# Altium PCB PCB1.PcbDoc
Units mm, origin at the board's own origin, x right, y up, seen from the top; angles counter-clockwise.
Board outline 114.17 x 52.7 mm, 2 copper layers (Top Layer, Bottom Layer); 27 components, 26 nets, 108 pads, 2 vias.
Unrouted connection lines stored in the file: 1.
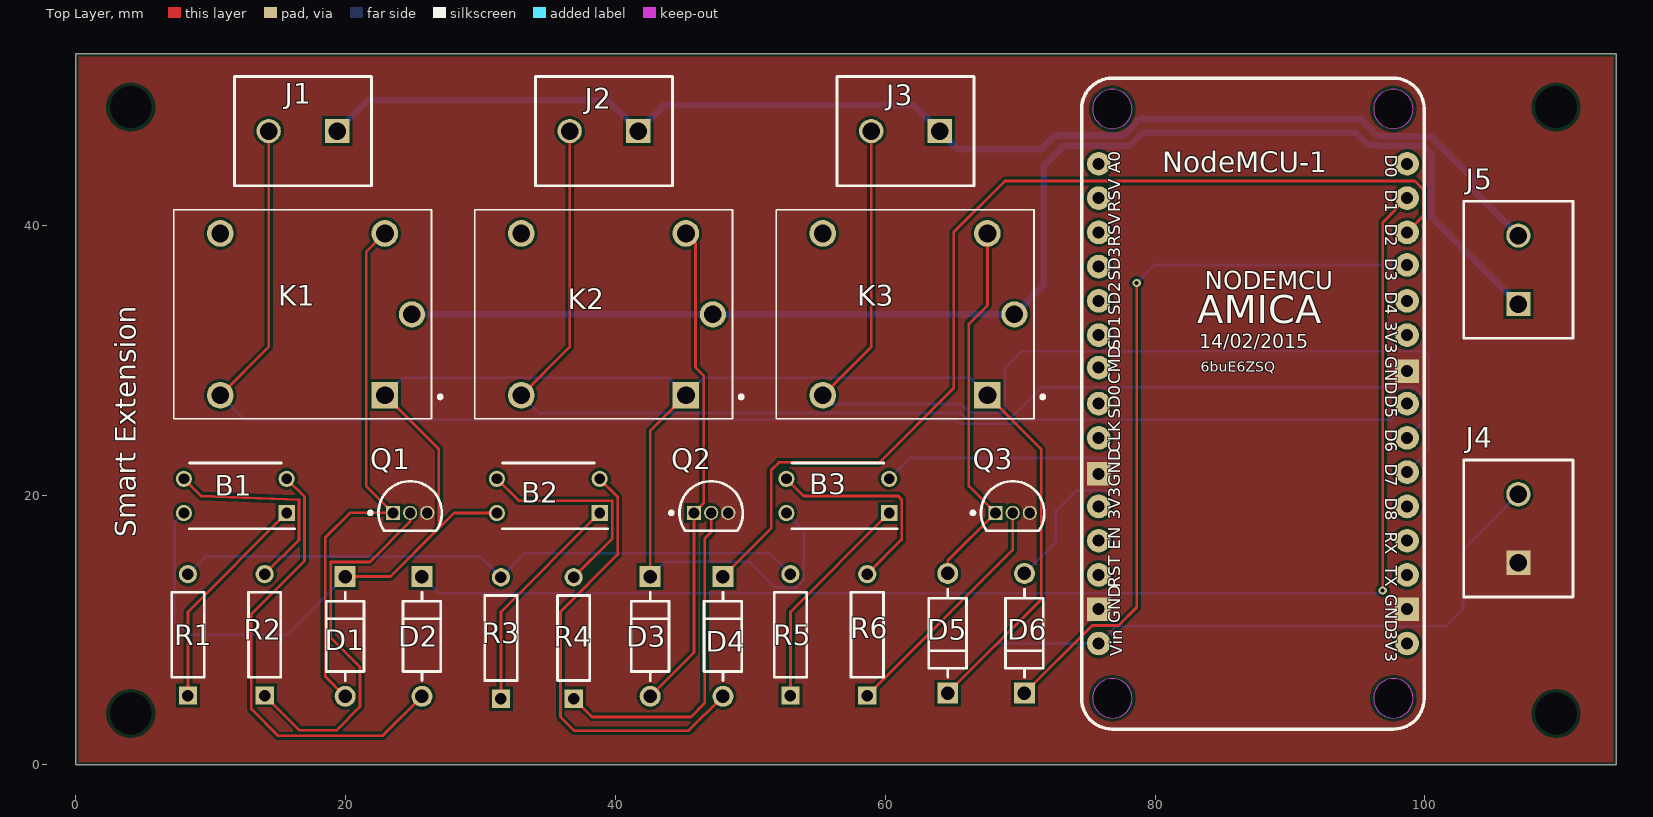
[diagram p0: Top Layer view]
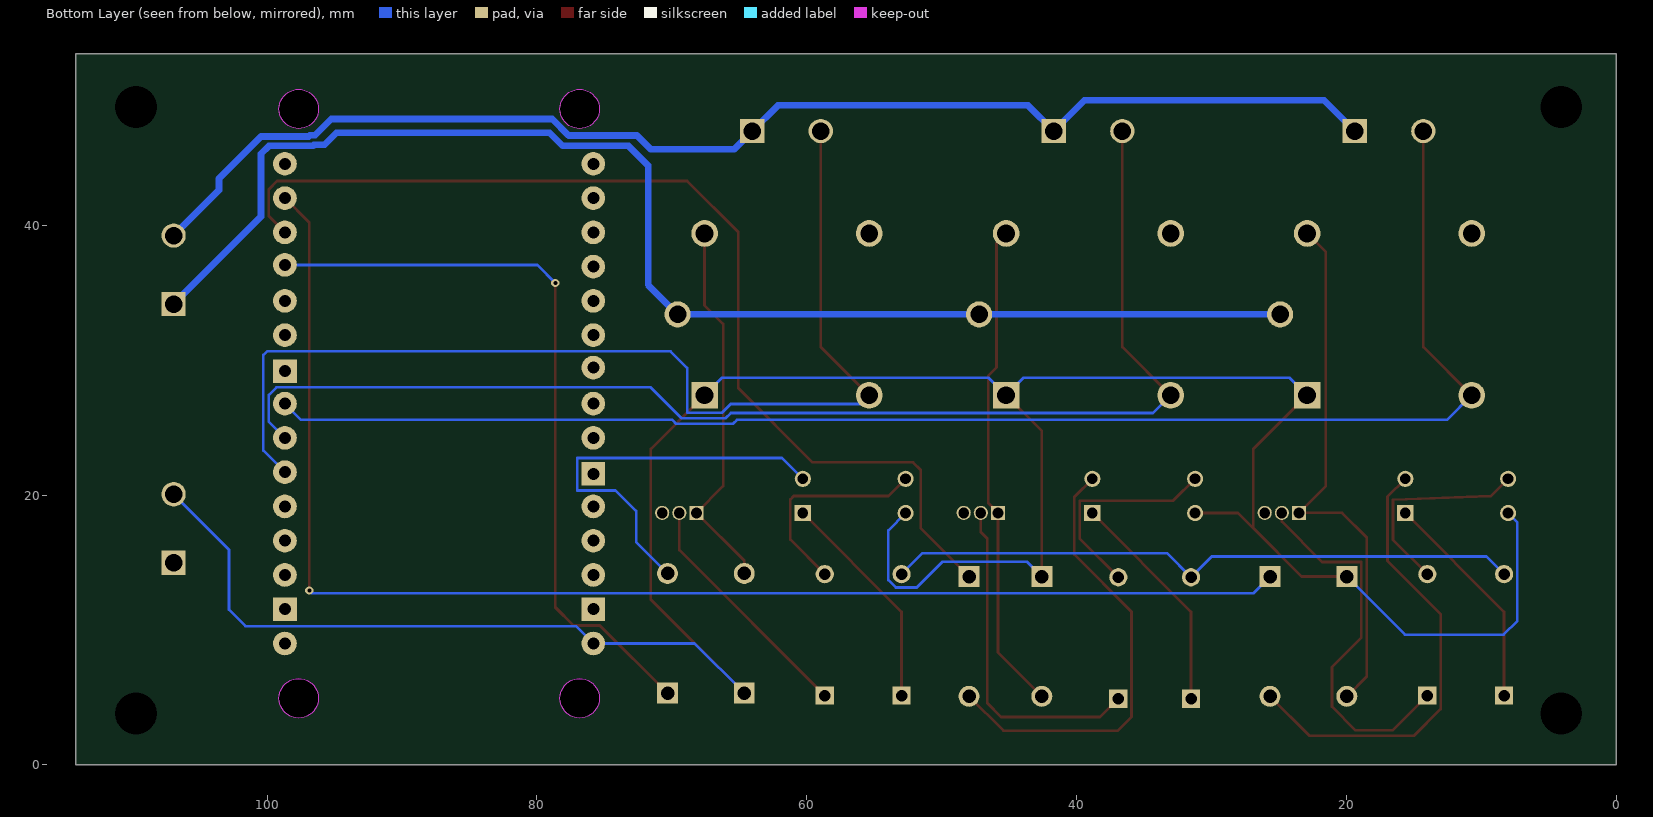
[diagram p1: Bottom Layer view, seen from below]
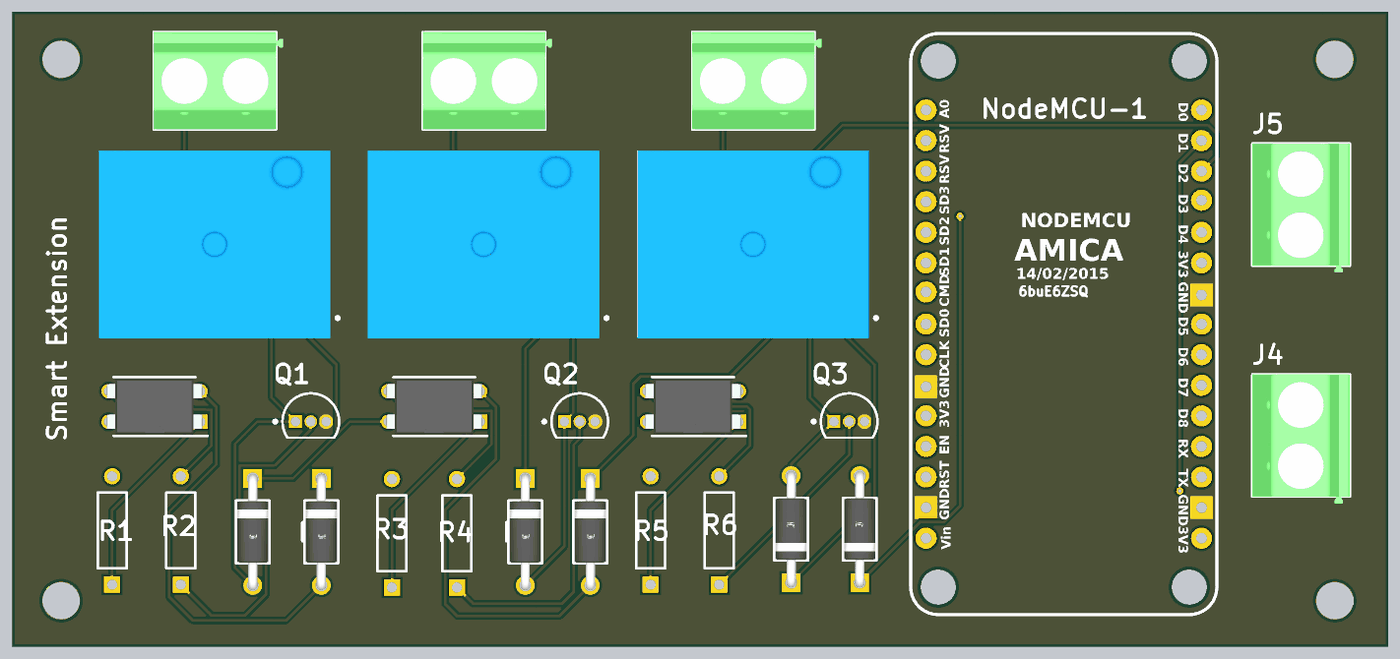
[diagram p2: 3D render of the assembled board from above, using the file's embedded part models]

## Layer stack, top to bottom
Top Solder: solder mask 0.0102, Solder Resist, Dk 3.5
Top Layer: signal copper 0.0356
Dielectric 1: dielectric 0.32, FR-4, Dk 4.8
Bottom Layer: signal copper 0.0356
Bottom Solder: solder mask 0.0102, Solder Resist, Dk 3.5

## Board outline
0,0 114.173,0 114.173,52.705 0,52.705

## Design rules (kind name [scope] priority, off if disabled: settings)
BoardOutlineClearance [All] p1: gap=0.2 ignorepadtopadclearanceinfootprint=FALSE
Clearance [All] p1: gap=0.203 ignorepadtopadclearanceinfootprint=FALSE except(0.25: Arc-Hole Track-Hole SMDPad-Hole THPad-Hole Via-Hole Fill-Hole Poly-Hole Region-Hole Text-Hole)
ComponentClearance [All] p1: gap=0.127 collisioncheckmode=3 verticalgap=0.127 showdistances=TRUE
DiffPairsRouting [All] p1: maxlimit=0.381 minlimit=0.203 mostfreqgap=0.203 toplayer_minwidth=0.203 toplayer_maxwidth=25.4 toplayer_prefwidth=0.203 bottomlayer_minwidth=0.203 bottomlayer_maxwidth=25.4 bottomlayer_prefwidth=0.203 maxuncoupledlength=12.7
Height [All] p1: minheight=0 maxheight=1816.048 prefheight=12.7
HoleSize [All] p1: absolutevalues=TRUE maxlimit=6.3 minlimit=0.3 maxpercent=80.000 minpercent=20.000
HoleToHoleClearance [All] p1: gap=0.25 allowstackedmicrovias=FALSE
MinimumAnnularRing [All] p1: minimumring=0.076
MinimumSolderMaskSliver [All] p1: minsoldermaskwidth=0
PlaneClearance [All] p1: clearance=0.203
PlaneConnect PlaneConnectPowerPads [InPadClass('PowerPads')] p1: planeconnectstyle=Direct reliefexpansion=0.508 reliefentries=4 reliefconductorwidth=0.254 reliefairgap=0.254
PlaneConnect [All] p2: pad.planeconnectstyle=Relief pad.reliefexpansion=0.3 pad.reliefentries=4 pad.reliefconductorwidth=0.203 pad.reliefairgap=0.203 via.planeconnectstyle=Direct via.reliefexpansion=0.3 via.reliefentries=4 via.reliefconductorwidth=0.127 via.reliefairgap=0.127
PolygonConnect PolygonConnectPowerPads [All vs (InPadClass('PowerPads'))] p1: connectstyle=Direct reliefconductorwidth=0.254 reliefentries=4 polygonreliefangle="90 Angle" airgapwidth=0.254
PolygonConnect [All] p2: connectstyle=Direct reliefconductorwidth=0.203 reliefentries=4 polygonreliefangle="90 Angle" airgapwidth=0.203
RoutingVias [All] p1: holewidth=0.3 width=0.6 viastyle="Through Hole" minholewidth=0.3 minwidth=0.6 maxholewidth=0.6 maxwidth=6.6
SilkToSilkClearance [All] p1: silktosilkclearance=0
SilkToSolderMaskClearance [IsPad] p1: minsilkscreentomaskgap=0.127 clearancetoexposedcopper=TRUE
SolderMaskExpansion [All] p1: expansion=0.075 istentingtop=FALSE
Width [All] p1: maxlimit=25.4 minlimit=0.203 preferedwidth=0.203 minimp=50.000000 maximp=50.000000 favimp=50.000000
20 further rules are at their usual default settings.

## Classes and differential pairs
component class 3_channel_relay: B1 B2 B3 D1 D2 D3 D4 D5 D6 J3 K1 K2 K3 NodeMCU1 Q1 Q2 Q3 R1 R2 R3 R4 R5 R6

## Components (designator, comment, footprint, x,y, rotation, side; value= is the part's Value field where it differs from the comment)
B1 "PC817X2NSZ0F" DIP762W60P254L458H400Q4N 11.811,19.939 r180 top
B2 "PC817X2NSZ0F" DIP762W60P254L458H400Q4N 35.015,19.939 r180 top
B3 "PC817X2NSZ0F" DIP762W60P254L458H400Q4N 56.478,19.939 r180 top
D1 "1N4007" FP-1N4007-MFG 19.959,9.525 r270 top value=15pF
D2 "1N4007" FP-1N4007-MFG 25.651,9.525 r270 top value=15pF
D3 "1N4007" FP-1N4007-MFG 42.571,9.525 r270 top value=15pF
D4 "1N4007" FP-1N4007-MFG 47.966,9.525 r270 top value=15pF
D5 "1N4007" FP-1N4007-MFG 64.626,9.755 r90 top value=15pF
D6 "1N4007" FP-1N4007-MFG 70.318,9.755 r90 top value=15pF
J1 "1729128" PHOE-1729128-2_V 16.829,46.99 r180 top
J2 "1729128" PHOE-1729128-2_V 39.144,46.99 r180 top
J3 "1729128" PHOE-1729128-2_V 61.496,46.99 r180 top
J4 "1729128" PHOE-1729128-2_V 106.934,17.526 r90 top
J5 "1729128" PHOE-1729128-2_V 106.934,36.703 r90 top
K1 "SRD-05VDC-SL-C" RELAY_SRD-05VDC-SL-C 16.801,33.401 r180 top
K2 "SRD-05VDC-SL-C" RELAY_SRD-05VDC-SL-C 39.116,33.401 r180 top
K3 "SRD-05VDC-SL-C" RELAY_SRD-05VDC-SL-C 61.468,33.401 r180 top
NodeMCU-1 "NodeMCU V1.0 ESP-12E" "NodeMCU V1.0 ESP-12E" 74.524,50.809 r0 top
Q1 "BC547B" ONSC-TO-92-3-29-11 24.776,18.684 r0 top
Q2 "BC547B" ONSC-TO-92-3-29-11 47.091,18.684 r0 top
Q3 "BC547B" ONSC-TO-92-3-29-11 69.443,18.684 r0 top
R1 "1K" RESA60-630X240 8.301,9.64 r90 top
R2 "1K" RESA60-630X240 13.993,9.64 r90 top
R3 "1K" RESA60-630X240 31.505,9.41 r90 top
R4 "1K" RESA60-630X240 36.9,9.41 r90 top
R5 "1K" RESA60-630X240 52.968,9.64 r90 top
R6 "1K" RESA60-630X240 58.66,9.64 r90 top

## Footprints (in the part's own frame and the unit in brackets; to place one, negate y for a bottom-side part, rotate by r counter-clockwise, add the part's x,y. Pads: shape width x height; smd on the part's side, far side on the other; paste and mask are expansions set on the pad)
DIP762W60P254L458H400Q4N [mm]
  rect 1.2x1.2 hole 0.8: 1(-3.81,1.27)
  round 1.2 hole 0.8: 2(-3.81,-1.27) 3(3.81,-1.27) 4(3.81,1.27)
  silkscreen extent -4.41,-2.44 3.4,2.44, body extent -3.96,-2.29 3.96,2.29, height 4
FP-1N4007-MFG [mm]
  rect 1.55x1.55 hole 1 paste-1000 mask+0: 1(-4.44,0)
  round 1.55 hole 1 paste-1000 mask+0: 2(4.44,0)
  silkscreen extent -3.27,-1.4 3.27,1.4, body extent -5.32,-1.5 5.32,1.5, height 0.25
"NodeMCU V1.0 ESP-12E" [mil]
  round 115 hole 115 unplated paste-300 mask-300: 0(91,-1806) 0(91,-86) 0(911,-1806) 0(911,-86)
  round 69 hole 35: 3V3(51,-1246) 3V3(951,-1646) 3V3(951,-746) A0(51,-246) CLK(51,-1046) CMD(51,-841) D0(951,-246) D1(951,-346) D2(951,-446) D3(951,-541) D4(951,-646) D5(951,-946) D6(951,-1046) D7(951,-1146) D8(951,-1246) EN(51,-1346) RST(51,-1446) RSV(51,-446) RSV(51,-346) RX(951,-1346) SD0(51,-946) SD1(51,-746) SD2(51,-646) SD3(51,-546) TX(951,-1446) VIN(51,-1646)
  rect 69x69 hole 35: GND(51,-1546) GND(51,-1151) GND(951,-1546) GND(951,-851)
  Keep-Out Layer circle w2: c91,-86 r57.5
  Keep-Out Layer circle w2: c911,-86 r57.5
  Keep-Out Layer circle w2: c91,-1806 r57.5
  Keep-Out Layer circle w2: c911,-1806 r57.5
  silkscreen extent 1,-1896 1001,4
ONSC-TO-92-3-29-11 [mm] "TO, 3-Leads, Body Dia 4.7mm, Pitch 1.27mm"
  rect 1.05x1.05 hole 0.8: 1(-1.27,0)
  round 1.05 hole 0.8: 2(0,0) 3(1.27,0)
  silkscreen extent -3.07,-1.34 2.35,2.35, body extent -2.35,-1.33 2.36,2.36, height 7.87
PHOE-1729128-2_V [mm] "Receptacle, 2-Leads, Body 8.1x10.16mm, Pitch 5.08mm"
  rect 1.8x1.8 hole 1.3: 1(-2.54,0)
  round 1.8 hole 1.3: 2(2.54,0)
  silkscreen extent -5.08,-4.05 5.08,4.05, body extent -5.65,-4.05 5.08,4.05, height 10.01
RELAY_SRD-05VDC-SL-C [mm]
  rect 1.98x1.98 / inner round 1.98 / far side rect 1.98x1.98 hole 1.32: A1(-6.1,6)
  round 1.98 hole 1.32: A2(-6.1,-6) NC(6.1,6) NO(6.1,-6)
  round 1.935 hole 1.29: COM(-8.1,0)
  silkscreen extent -10.3,-7.75 9.55,7.75, body extent -9.6,-7.8 9.6,7.8, height 15.8
RESA60-630X240 [mm] "Axial Resistor, 2-Leads, Dia 2.4mm, Body Length 6.3mm"
  rect 1.35x1.35 hole 0.85: 1(-4.5,0)
  round 1.35 hole 0.85: 2(4.5,0)
  silkscreen extent -3.15,-1.2 3.15,1.2, body extent -3.15,-1.2 3.15,1.2, height 2.4

## Part data
B1 B2 B3: "Photocoupler 1-CH Transistor 4-Pin PDIP Sharp PC817X2NSZ0F DC Input Transistor Output Optocoupler, Through Hole, 4-Pin PDIP", Manufacturer_Name="Sharp Microelectronics", Mouser Part Number=N/A, Datasheet Link=https://datasheet.datasheetarchive.com/originals/distributors/Datasheets_SAMA/458e45842a103a05998fcebbd6f7366e.pdf, Geometry.Height=4mm, Manufacturer_Part_Number=PC817X2NSZ0F, Mouser Price/Stock=https://www.mouser.co.uk/ProductDetail/Sharp-Microelectronics/PC817X2NSZ0F?qs=6kT3pPPHxnU7uYWM8Yy85A%3D%3D
D1 D2 D3 D4 D5 D6: library part CMP-123542-000001-1, "Rectifier diode 1000 V 1 A DO-41, ,", Capacitance=15pF, Forward Current=1A, Manufacturer=Diotec, Max Junction Temp=+175°C, Max Repetitive Reverse Voltage=1000V, Max Surge Forward Current=27A, Peak Reverse Current=5uA, Temperature="-50°C to +175°C", Temperature Range Low=-50°C, Automotive=No, Category=Diode, ComponentLink2Description=Datasheet, ComponentLink2URL=https://datasheet.octopart.com/1N4007-Diotec-datasheet-62346875.pdf, Device Class L1="Discrete Semiconductors", Device Class L2=Diodes, Device Class L3="Rectifier Diodes", Height=2.8mm, Ipc Land Pattern Name=DIOAD888W100L520D280, Lead Free=Yes, Manufacturer Part Number=1N4007, Octopart=https://octopart.com/1n4007-diotec-4040411, Package=1N4007, Reverse Voltage=1000V, RoHS=TRUE, Temperature Range High=+175°C
J1 J2 J3 J4 J5: library part CMP-2000-05815-1, "PCB Terminal Block, 13.5 A, 400 V, 2-Pin THD, RoHS, Bulk", Current Rating=13500mA, Manufacturer="Phoenix Contact", Package Description="2-Pin Through Hole Device, Body 8.1 x 10.16 mm, Pitch 5.08 mm", Package Reference=1729128-2, Package Version=03/2015, Voltage Rating=400V, Datasheet URL=https://datasheet.ciiva.com/16046/1729128-16046181.pdf, Datasheet Version=12/2013, Manufacturer URL=http://www.phoenixcontact.com/, Mounting Technology=ThroughHole, No. of Positions=2, No. of Rows=1, Orientation=Horizontal, Package URL=https://www.phoenixcontact.com/online/portal/pi/pxc/product_detail_page/!ut/p/b1/3VdJjqNKFDxLH8AFycySyWY2ozFsEPOMMQaDOX1XedGL_1Vdm5YXJleknhSKeBkvI6EA8ncAo3AYoDhBQGco6KN7VURTdemj9us_IEKEZo_YHiPAEWEFmDGOHMORkqKYCORBZxgL7ZoaZYcbFFUZ3fqxSY6GOuxydWUuHqz1ynmMFygu583Bob0Ewr6Sd_l-5m-kAueHiB0jpRwZwe58wwtkpxtMYd_LmGcDRU02dRNEyWt6Y2ti5pSyJ_reIkzIulrqApdnbT11V5jnCKbYNCvhEM1MCpPByat_X379-iThf08CI5GfOPqfBeS3BRoBOdD55AKVv0iLwCMq-2BrzXWSGRH7pUGD9uwXQjiph3xL0DKQwdGa0JImiIOmBNOestqgwTHSSs2oOep-78apyXQBvNi8ZLaFjvjWvcaUEBu0MC6Wbe-d6mB0FAebo2lUWinqYaZs5DAYzV0RP9yitUjnGJ0iI9xhZkT42OCQNUJJhkgWINNQLP2JFP6OpMg3JCVg70jqHT0lvKOnhHf0lPuOnnLf0VPuWx6_dxwUIvwk5WMkT0kLL1mh61l2yZVSzG3pYV_bqo-mj6uMKwKwdnnW8Jh5RTOJzMOA5c-eJDaZQw4mTMPH02PvS_ZAqNVjVTo2WyYLkwH_KU1mmmG5kjRhDqPXLwwVHvVOjCM60-fpXvTDfMGW1PVFVS1r4e4yVDk4ZdNbkUHvqPqQSeian4UD39fNKmachqdJ1NJbyk8rXT9mXTvPk3oE5meulKGgiruPJek-4I9hTT6G8ZLOyRSm2RRVbThERQad5OS28hdt4YW4vG0stgYYzsWsK4_7y6DZMjJSCqri1kyiZR5vD7pwIrNR7QwPHTcLTI5qT7eRlpHrdGiupYlqQDJ7zy_CND8fWWBoLRXxk1RVcXiBQwbTD4Xi7KL-FuO94t9xaqweXzH, Packing=Bulk, PartNumber=1729128, Pitch=5.08mm, RoHS=TRUE
K1 K2 K3: "5V Trigger Relay Module For Arduino And Raspberry Pi 5V Trigger Relay Module For Arduino And Raspberry Pi", Package="NON STANDARD-5 Songle Relay", Availability="Not in stock", Check_prices=https://www.snapeda.com/parts/SRD-05VDC-SL-C/Songle+Relay/view-part/?ref=eda, MF="Songle Relay", MP=SRD-05VDC-SL-C, Price=None, SnapEDA_Link=https://www.snapeda.com/parts/SRD-05VDC-SL-C/Songle+Relay/view-part/?ref=snap
NodeMCU-1: "NodeMCU V1.0 ESP8266 (ESP-12E)"
Q1 Q2 Q3: library part CMP-1048-01467-1, "Amplifier Transistor, NPN Silicon, 3-Pin TO-92, Bulk Box", Manufacturer="On Semiconductor", ComponentLink1Description="Manufacturer URL", ComponentLink1URL=http://www.onsemi.com/, ComponentLink2Description=Datasheet, ComponentLink2URL=http://www.onsemi.com/pub_link/Collateral/BC546-D.PDF, ComponentLink3Description="Package Specification", ComponentLink3URL=http://www.onsemi.cn/pub_link/Collateral/2N6426-D.PDF, DatasheetVersion="Rev. 7", fT Min (MHz)=150, IC Continuous (A)=0.1, Mounting Technology="Through Hole", PackageDescription="3-Pin Transistor Outline, Body 4.825 x 3.685 mm, Pitch 1.27 mm", PackageReference=TO-92-3-29-11_AM_SL, PackageVersion="Rev. AM", Packing="Bulk Box", PartNumber=BC547B, Polarity=NPN, RoHS=FALSE
R1 R2 R3 R4 R5 R6: library part CMP-1659-00075-1, "Axial Resistor, 1 KOhm, +/- 1%, 250 mW, -55 to 155 degC, 2-Pin THD, RoHS, Bulk", Case\Package=Axial, Max Operating Temperature="155 degC", Min Operating Temperature="-55 degC", Package Quantity=200, Power Rating="250 mW", Resistance="10 kohm", Tolerance=1%, Voltage Rating="250 V", ComponentLink1Description="Manufacturer URL", ComponentLink1URL=http://www.yageo.com/, ComponentLink2Description=Datasheet, ComponentLink2URL=http://www.yageo.com/documents/recent/Yageo%20LR_MFR_2013.pdf, DatasheetVersion=Apr-13, Length="0.248 inch", PackageDescription="2-Pin Axial Lead, Dia 2.4 mm, Body Length 6.3 mm", PackageReference=MFR-25, Packaging=Bulk, RoHSCompliant=true

## Free pads (board coordinates)
  round 1.524 hole 3.1: 1(4.064,48.768) 1(109.728,3.81) 1(109.728,48.768) 4(4.064,3.81)

## Via types
v1: diameter 0.6, hole 0.3, Top Layer to Bottom Layer, 2 vias

## Nets (pads, with @x,y where several pads share a name; then routed paths per layer and width w, separated by ;. In a path a pad name is that pad's centre, name@x,y a point inside that pad or via, vN(x,y) a via of type N, cw(c..) or ccw(c..) an arc to the next point about the centre after c; other vN are vias at no path point)
+5: B1.4 B2.4 B3.4 D1.1 D3.1 D5.1 J4.2 K1.A1 K2.A1 K3.A1 NodeMCU-1.VIN | length 210.2
  Top Layer w0.203: D1.1 23.312,13.965 ; K1.A1 26.899,23.403 26.899,17.551 23.312,13.965 ; B2.4 28.021,18.669 23.317,13.965 23.312,13.965 ; D3.1 42.571,24.756 K2.A1 ; D5.1 71.552,12.24 71.552,23.417 K3.A1
  Bottom Layer w0.203: B1.4 7.315,17.983 7.315,10.668 8.331,9.652 15.646,9.652 D1.1 ; K1.A1 24.202,28.702 43.915,28.702 K2.A1 46.517,28.702 66.267,28.702 K3.A1 ; D3.1 43.668,15.062 49.936,15.062 51.841,13.157 53.391,13.157 53.95,13.716 53.95,17.387 B3.4 ; D5.1 68.312,9.001 NodeMCU-1.VIN 77.105,10.287 101.6,10.287 102.819,11.506 102.819,15.951 J4.2
+5V: R1.2 R3.2 R5.2 | length 47.2
  Bottom Layer w0.203: R1.2 9.604,15.443 29.972,15.443 R3.2 33.292,15.697 51.411,15.697 R5.2
GND: J4.1 NodeMCU-1.GND Q1.3 Q2.3 Q3.3
N: J1.1 J2.1 J3.1 J5.2 | length 96.6
  Bottom Layer w0.5: J1.1 21.655,49.276 39.398,49.276 J2.1 43.589,48.895 62.131,48.895 J3.1 65.393,45.633 71.541,45.633 72.572,46.664 77.647,46.664 78.862,47.879 95.25,47.879 96.452,46.677 96.838,46.677 96.922,46.594 100.455,46.594 103.57,43.479 103.57,42.607 J5.2
NetB1_1: B1.1 R1.1 | length 16.6
  Top Layer w0.203: R1.1 8.301,11.349 B1.1
NetB1_2: B1.2 D2.2 | length 33.9
  Top Layer w0.203: B1.2 16.942,19.888 16.942,15.113 13.005,11.176 13.005,4.14 14.986,2.159 22.725,2.159 D2.2
NetB1_3: B1.3 R2.2 | length 15.6
  Top Layer w0.203: B1.3 9.271,19.939 16.535,19.66 16.535,16.683 R2.2
NetB2_1: B2.1 R3.1 | length 16.8
  Top Layer w0.203: R3.1 31.505,11.349 B2.1
NetB2_2: B2.2 D4.2 | length 33.5
  Top Layer w0.203: B2.2 40.157,19.877 40.157,15.596 35.916,11.354 35.916,3.556 36.932,2.54 45.421,2.54 D4.2
NetB2_3: B2.3 R4.2 | length 16.1
  Top Layer w0.203: B2.3 32.831,19.583 39.751,19.583 39.751,16.761 R4.2
NetB3_1: B3.1 R5.1 | length 16.6
  Top Layer w0.203: R5.1 52.968,11.349 B3.1
NetB3_2: B3.2 D6.2 | length 30.4
  Bottom Layer w0.203: B3.2 61.837,22.758 77.013,22.758 77.013,20.345 74.168,20.345 72.644,18.821 72.644,16.521 D6.2
NetB3_3: B3.3 R6.2 | length 15.8
  Top Layer w0.203: B3.3 53.938,19.939 60.96,19.939 61.214,19.685 61.214,16.694 R6.2
NetD1_2: D1.2 K1.A2 Q1.1 | length 40.3
  Top Layer w0.203: D1.2 18.473,6.571 18.473,16.837 20.32,18.684 Q1.1 21.514,20.676 21.514,38.014 K1.A2
NetD3_2: D3.2 K2.A2 Q2.1 | length 36.5
  Top Layer w0.203: D3.2 45.821,8.335 Q2.1 46.533,19.396 46.533,28.854 45.923,29.464 45.923,38.694 K2.A2
NetD5_2: D5.2 K3.A2 Q3.1 | length 28.1
  Top Layer w0.203: D5.2 64.626,15.137 Q3.1 66.192,20.665 66.192,32.69 67.568,34.065 K3.A2
NetQ1_2: Q1.2 R2.1 | length 28.3
  Top Layer w0.203: R2.1 16.567,2.565 19.304,2.565 21.057,4.318 21.057,7.264 18.88,9.441 18.88,15.045 21.787,15.045 24.776,18.034 Q1.2
NetQ2_2: Q2.2 R4.1 | length 25
  Top Layer w0.203: R4.1 38.254,3.556 45.593,3.556 46.609,4.572 46.609,16.764 47.091,17.246 Q2.2
NetQ3_2: Q3.2 R6.1 | length 18
  Top Layer w0.203: R6.1 69.443,15.923 Q3.2
Out1_1: J1.2 K1.NC NodeMCU-1.D5 | length 110.5
  Top Layer w0.203: K1.NC 14.289,30.989 J1.2
  Bottom Layer w0.203: K1.NC 12.524,25.578 65.176,25.578 65.46,25.293 69.676,25.293 69.96,25.578 97.476,25.578 NodeMCU-1.D5
Out2_1: J2.2 K2.NC NodeMCU-1.D6 | length 93.5
  Top Layer w0.203: K2.NC 36.604,30.989 J2.2
  Bottom Layer w0.203: K2.NC 34.331,26.086 65.621,26.086 66.007,25.7 69.269,25.7 71.56,27.991 99.314,27.991 99.873,27.432 99.873,25.435 NodeMCU-1.D6
Out3_1: J3.2 K3.NC NodeMCU-1.D7 | length 79.8
  Top Layer w0.203: K3.NC 58.956,30.989 J3.2
  Bottom Layer w0.203: K3.NC 56.023,26.746 65.629,26.746 66.269,26.106 68.863,26.106 68.863,29.417 70.104,30.658 100,30.658 100.279,30.378 100.279,23.301 NodeMCU-1.D7
P: J5.1 K1.COM K2.COM K3.COM | length 100.8
  Bottom Layer w0.5: K1.COM K2.COM K3.COM 71.755,35.588 71.755,44.45 73.195,45.89 78.088,45.89 79.06,46.863 94.854,46.863 95.743,45.974 96.52,45.974 96.604,45.89 99.871,45.89 100.457,45.305 100.457,40.64 J5.1
Relay1_1: D2.1 NodeMCU-1.D1 | length 101.7
  Top Layer w0.203: v1(96.876,12.929) 96.876,40.218 NodeMCU-1.D1
  Bottom Layer w0.203: D2.1 26.891,12.725 96.672,12.725 v1(96.876,12.929)
Relay2_1: D4.1 NodeMCU-1.D2 | length 77.3
  Top Layer w0.203: D4.1 51.537,17.536 51.537,21.844 52.121,22.428 59.563,22.428 65.075,27.94 65.075,39.497 68.859,43.282 99.263,43.282 99.873,42.672 99.873,40.675 NodeMCU-1.D2
Relay3_1: D6.1 NodeMCU-1.D3 | length 55.6
  Top Layer w0.203: D6.1 75.341,10.338 77.292,10.338 78.638,11.684 v1(78.638,35.738)
  Bottom Layer w0.203: v1(78.638,35.738) 79.969,37.068 NodeMCU-1.D3
pads on no net: K1.NO K2.NO K3.NO NodeMCU-1.0 NodeMCU-1.3V3 NodeMCU-1.A0 NodeMCU-1.CLK NodeMCU-1.CMD NodeMCU-1.D0 NodeMCU-1.D4 NodeMCU-1.D8 NodeMCU-1.EN NodeMCU-1.RST NodeMCU-1.RSV NodeMCU-1.RX NodeMCU-1.SD0 NodeMCU-1.SD1 NodeMCU-1.SD2 NodeMCU-1.SD3 NodeMCU-1.TX

## Polygon pours and split planes (outlines as drawn)
GND on Top Layer "GND_L01_P001" (solid, pour order 1): 0,0 114.173,0 114.173,52.705 0,52.705

## Silkscreen, mask and mechanical layers (free items; w line width, h text height)
Top Overlay:
  text "Smart Extension" at 4.445,16.891 h1.52 r90
Mechanical 1:
  lines w0.254: 0,0.254 0,52.832 114.173,52.832 114.173,0.254 114.3,0.127 0.127,0.127 0,0.254

## Text inside footprints (layer, text, board x,y; h text height)
NodeMCU-1: Top Overlay "GND" at 77.724,20.634 h1.52 r90; Top Overlay "3V3" at 77.724,18.17 h1.52 r90; Top Overlay "EN" at 77.724,15.961 h1.52 r90; Top Overlay "RST" at 77.724,13.116 h1.52 r90; Top Overlay "GND" at 77.724,10.5 h1.52 r90; Top Overlay "Vin" at 77.851,8.066 h1.52 r90; Top Overlay "D7" at 96.774,22.33 h1.52 r270; Top Overlay "D8" at 96.774,19.793 h1.52 r270; Top Overlay "RX" at 96.774,17.28 h1.52 r270; Top Overlay "TX" at 96.774,14.767 h1.52 r270; Top Overlay "GND" at 96.774,12.653 h1.52 r270; Top Overlay "3V3" at 96.774,10.017 h1.52 r270; Top Overlay "D6" at 96.774,24.898 h1.52 r270; Top Overlay "CMD" at 77.724,28.225 h1.52 r90; Top Overlay "D0" at 96.774,45.221 h1.52 r270; Top Overlay "D1" at 96.774,42.647 h1.52 r270; Top Overlay "D2" at 96.774,40.101 h1.52 r270; Top Overlay "D3" at 96.774,37.561 h1.52 r270; Top Overlay "D4" at 96.774,35.061 h1.52 r270; Top Overlay "3V3" at 96.774,32.902 h1.52 r270; Top Overlay "GND" at 96.774,30.312 h1.52 r270; Top Overlay "D5" at 96.774,27.416 h1.52 r270; Top Overlay "A0" at 77.724,43.875 h1.52 r90; Top Overlay "RSV" at 77.724,40.98 h1.52 r90; Top Overlay "RSV" at 77.724,38.429 h1.52 r90; Top Overlay "SD3" at 77.724,35.878 h1.52 r90; Top Overlay "SD2" at 77.724,33.327 h1.52 r90; Top Overlay "SD1" at 77.724,30.776 h1.52 r90; Top Overlay "SD0" at 77.724,25.674 h1.52 r90; Top Overlay "CLK" at 77.724,23.123 h1.52 r90; Top Overlay "6buE6ZSQ" at 83.388,29.143 h0.76; Top Overlay "NODEMCU" at 83.668,34.833 h2.29; Top Overlay "AMICA" at 83.134,32.039 h3.56; Top Overlay "14/02/2015" at 83.287,30.54 h1.75